# Altium PCB GbE_Interface_Adapter.PcbDoc (part 1 of 2)
Units mm, origin at the board's own origin, x right, y up, seen from the top; angles counter-clockwise.
Board outline 70.72 x 41.02 mm, 4 copper layers (Top Layer, GND, PWR/GND, Bottom Layer), stack 1.583 mm thick; 95 components, 56 nets, 318 pads, 400 vias.
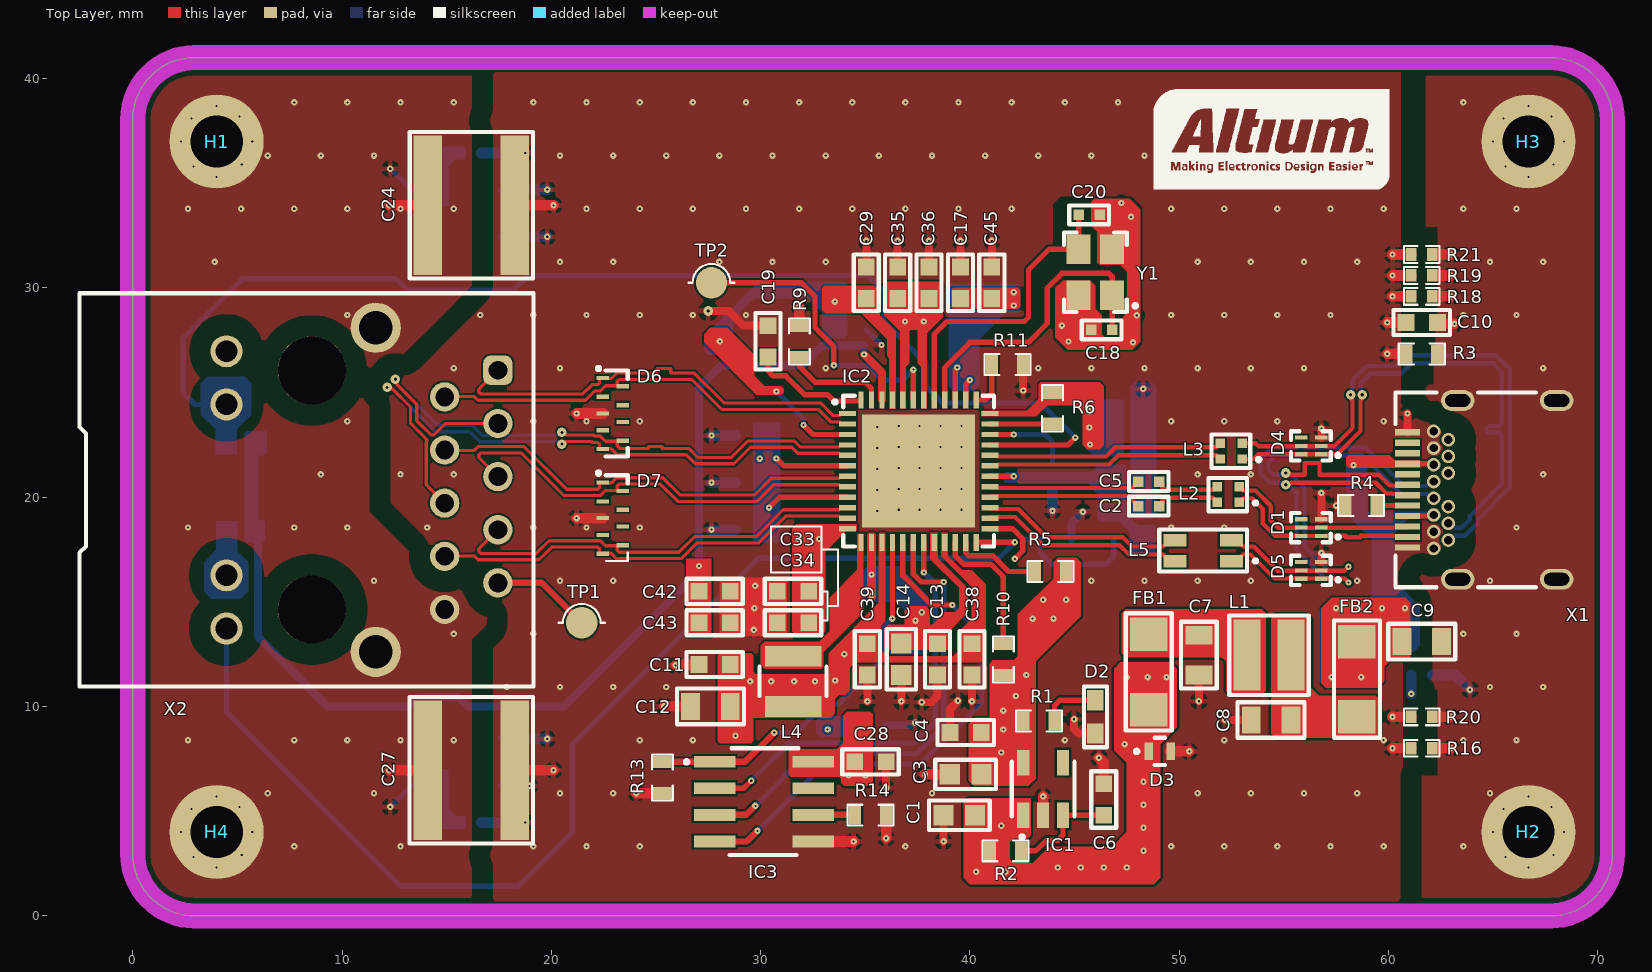
[diagram p0: Top Layer view]
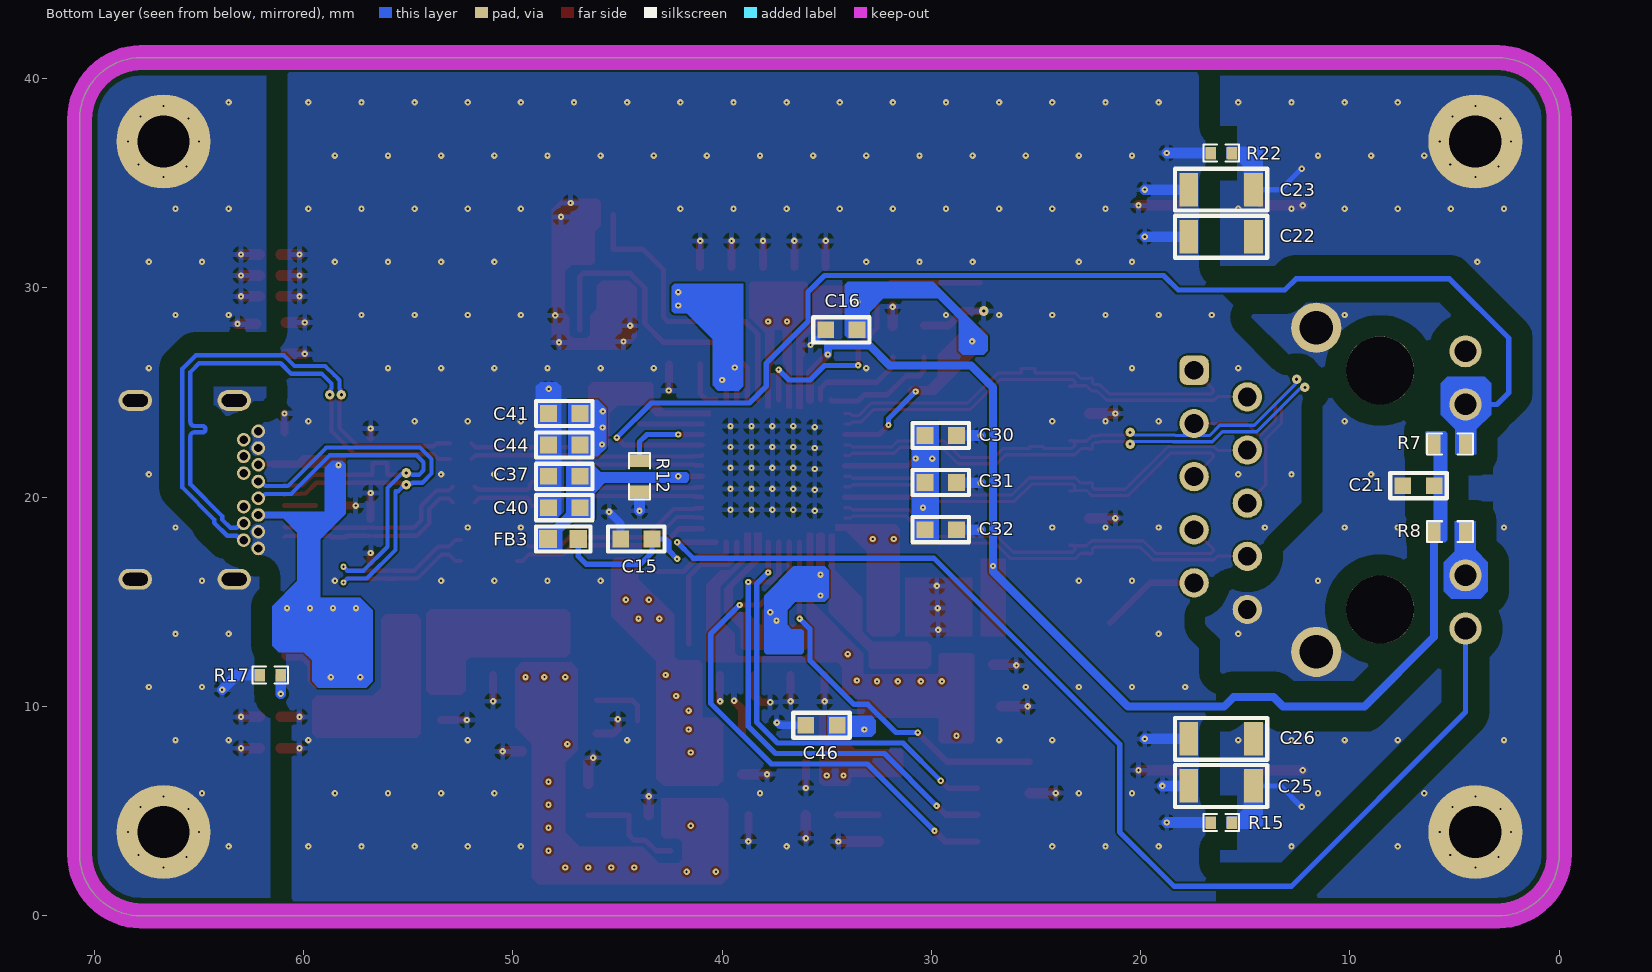
[diagram p1: Bottom Layer view, seen from below]
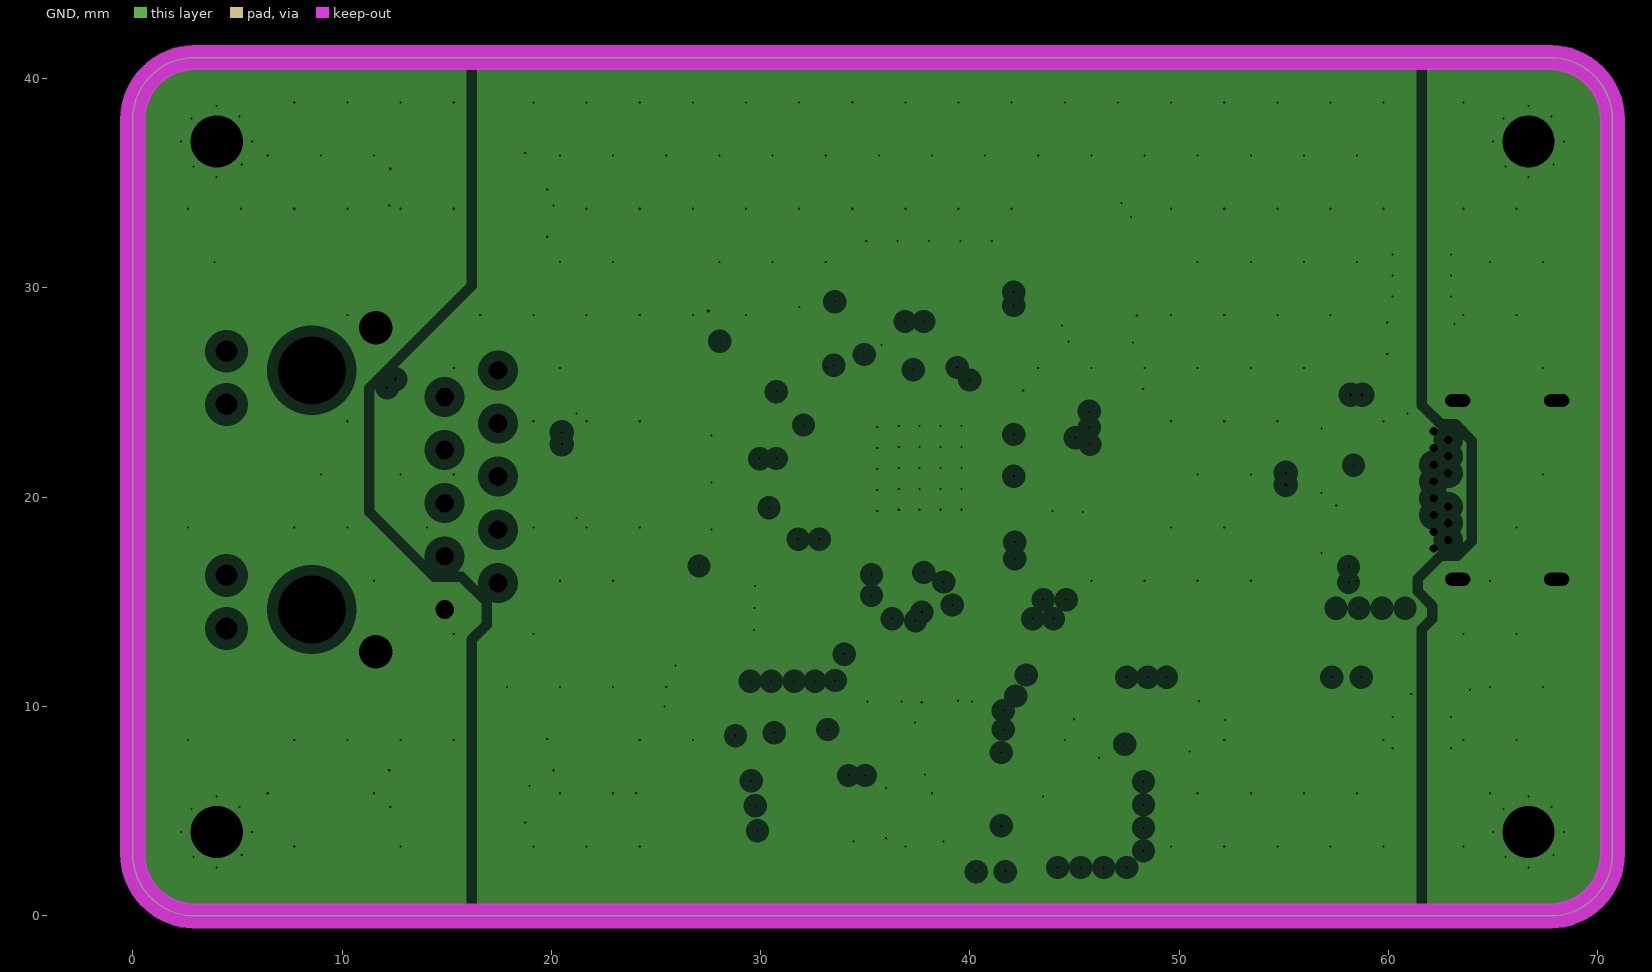
[diagram p2: GND, clearances drawn from the general rule]
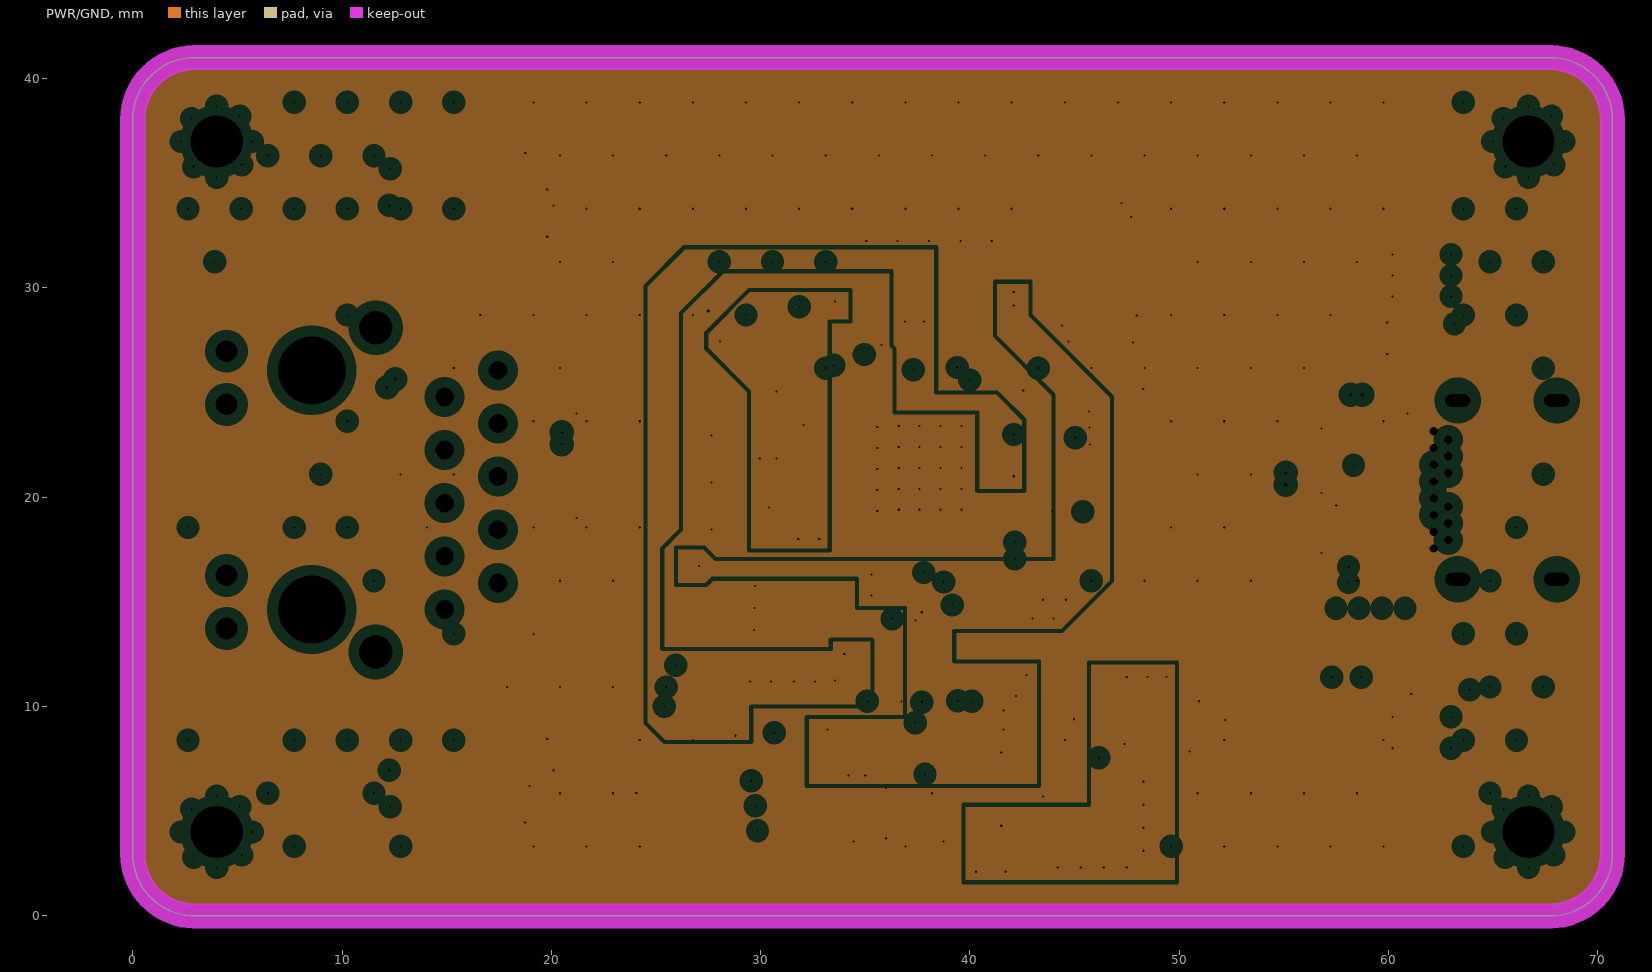
[diagram p3: PWR/GND, clearances drawn from the general rule]
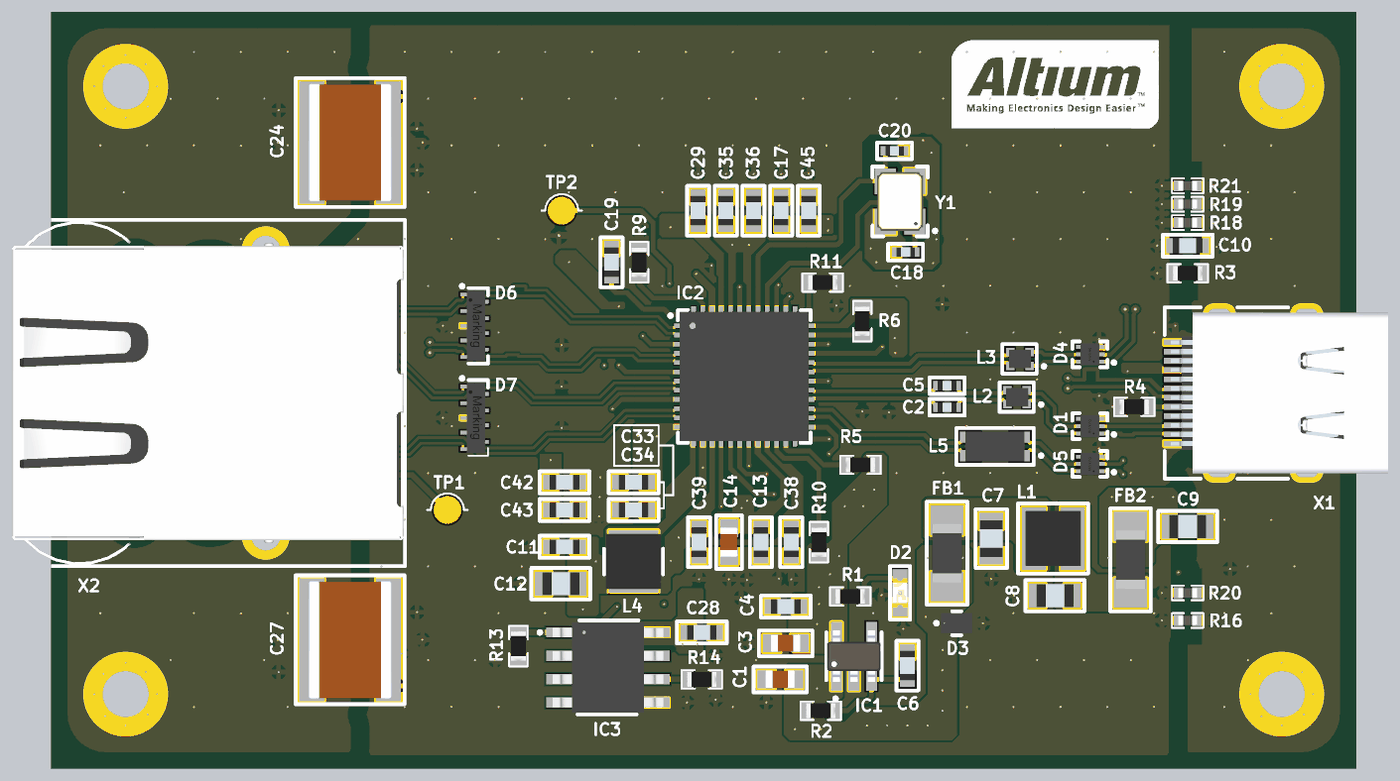
[diagram p5: 3D render of the assembled board from above, using the file's embedded part models]
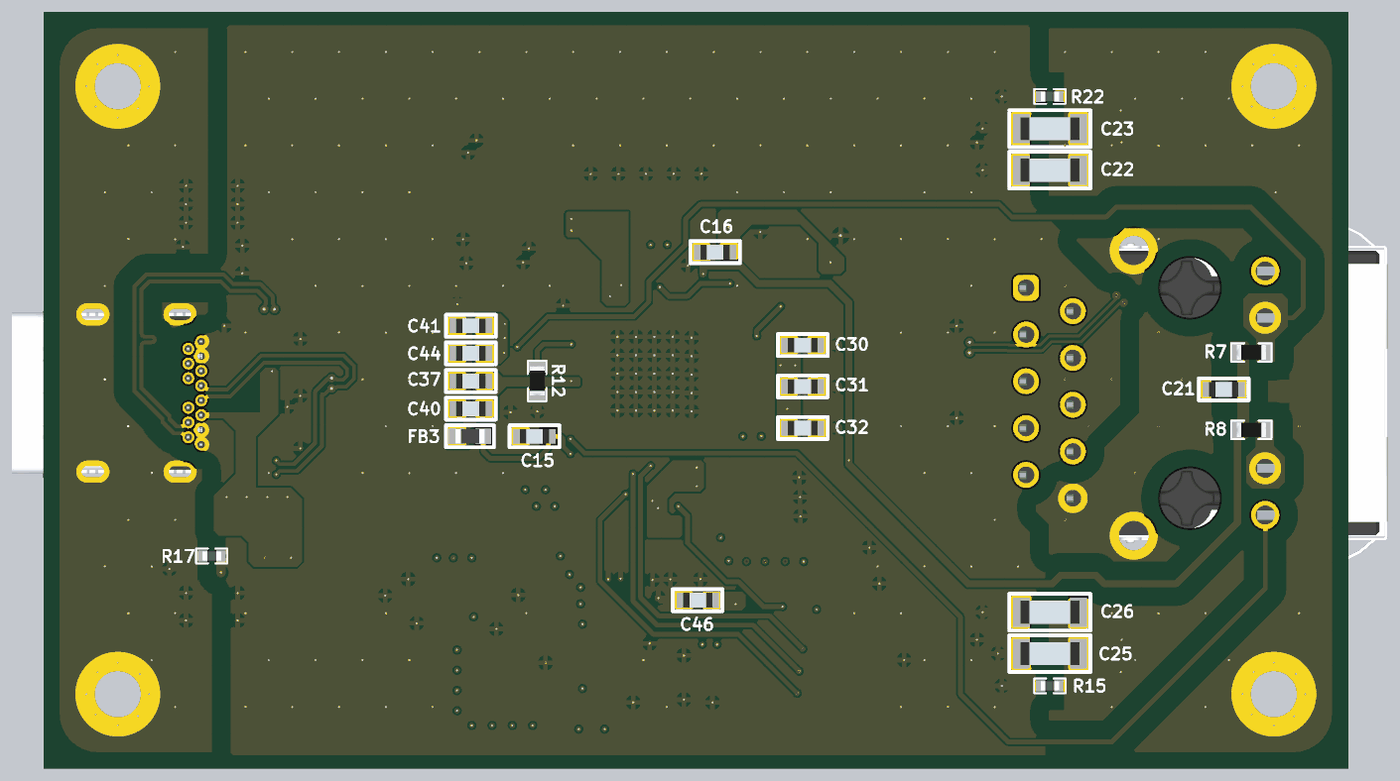
[diagram p6: 3D render of the assembled board from below, using the file's embedded part models]

## Layer stack, top to bottom
Top Solder: solder mask 0.0102, Solder Resist, Dk 3.5
Top Layer: signal copper 0.035
Dielectric 2: prepreg 0.1295, PP-017, Dk 4.3
GND: plane copper 0.0175, net (Multiple Nets)
Dielectric 1: core 1.2192, Core-024, Dk 4.6
PWR/GND: plane copper 0.0175, net (Multiple Nets)
Dielectric 3: prepreg 0.1295, PP-017, Dk 4.3
Bottom Layer: signal copper 0.035
Bottom Solder: solder mask 0.0102, Solder Resist, Dk 3.5

## Board outline
2.95,-0.011 cw(c2.95,2.95) -0.011,2.95 -0.011,38.05 cw(c2.95,38.05) 2.95,41.011 67.75,41.011 cw(c67.75,38.05) 70.711,38.05 70.711,2.95 cw(c67.75,2.95) 67.75,-0.011

## Design rules (kind name [scope] priority, off if disabled: settings)
Clearance Clearance_KeepOut_2 [InNet('SHIELD_USB') vs OnLayer('Keep-Out Layer')] p1: gap=0.254 ignorepadtopadclearanceinfootprint=TRUE
Clearance Clearance_KeepOut_1 [InNet('SHIELD') vs OnLayer('Keep-Out Layer')] p2: gap=0.254 ignorepadtopadclearanceinfootprint=TRUE
Clearance Clearance_USBShield [InNet('SHIELD_USB')] p3: gap=1.016 ignorepadtopadclearanceinfootprint=TRUE
Clearance Clearance_Shield [InNet('SHIELD')] p4: gap=1.016 ignorepadtopadclearanceinfootprint=TRUE
Clearance Clearance_Genel [All] p5: gap=0.102 ignorepadtopadclearanceinfootprint=TRUE
Clearance Clearance_Polygon [InPolygon] p6: gap=0.305 ignorepadtopadclearanceinfootprint=TRUE
Clearance Clearance_MDI [InDifferentialPairClass('ETH')] p7: gap=0.102 ignorepadtopadclearanceinfootprint=TRUE except(0.305: Arc-Arc Arc-Track Track-Track)
Clearance Clearance_Diff [InDifferentialPairClass('USB2') OR InDifferentialPairClass('USB3')] p8: gap=0.102 ignorepadtopadclearanceinfootprint=TRUE
DiffPairsRouting [InDifferentialPair ('USB2D1')] p1: maxlimit=0.178 minlimit=0.178 mostfreqgap=0.178 toplayer_minwidth=0.203 toplayer_maxwidth=0.203 toplayer_prefwidth=0.203 bottomlayer_minwidth=0.203 bottomlayer_maxwidth=0.203 bottomlayer_prefwidth=0.203 maxuncoupledlength=12.7
DiffPairsRouting USB3.0 [InDifferentialPairClass('USB3.0')] p2: maxlimit=0.178 minlimit=0.178 mostfreqgap=0.178 toplayer_minwidth=0.203 toplayer_maxwidth=0.203 toplayer_prefwidth=0.203 bottomlayer_minwidth=0.203 bottomlayer_maxwidth=0.203 bottomlayer_prefwidth=0.203 maxuncoupledlength=12.7
DiffPairsRouting USB2.0 [InDifferentialPairClass('USB2.0')] p3: maxlimit=0.178 minlimit=0.178 mostfreqgap=0.178 toplayer_minwidth=0.203 toplayer_maxwidth=0.203 toplayer_prefwidth=0.203 bottomlayer_minwidth=0.203 bottomlayer_maxwidth=0.203 bottomlayer_prefwidth=0.203 maxuncoupledlength=12.7
DiffPairsRouting ETH [InDifferentialPairClass('ETH')] p4: maxlimit=0.152 minlimit=0.152 mostfreqgap=0.152 toplayer_minwidth=0.152 toplayer_maxwidth=0.152 toplayer_prefwidth=0.152 bottomlayer_minwidth=0.152 bottomlayer_maxwidth=0.152 bottomlayer_prefwidth=0.152 maxuncoupledlength=12.7
HoleSize HoleSize_1 [All] p1: absolutevalues=TRUE maxlimit=2.54 minlimit=0.025 maxpercent=80.000 minpercent=20.000
MatchedLengths MatchedLengths_ETH [InDifferentialPairClass('ETH')] p1: tolerance=0.127 checknetsindiffpair=TRUE checkdiffpairvsdiffpair=FALSE checkxsignals=FALSE checkothers=FALSE
MatchedLengths MatchedLengths_USB3.0 [InDifferentialPairClass('USB3.0')] p2: tolerance=0.127 checknetsindiffpair=TRUE checkdiffpairvsdiffpair=FALSE checkxsignals=FALSE checkothers=FALSE
MatchedLengths MatchedLengths2.0 [InDifferentialPairClass('USB2.0')] p3: tolerance=0.127 checknetsindiffpair=TRUE checkdiffpairvsdiffpair=FALSE checkxsignals=FALSE checkothers=FALSE
PlaneClearance PlaneClearance_USBShield [InNet('SHIELD_USB')] p1: clearance=1.016
PlaneClearance PlaneClearance_Shield [InNet('SHIELD')] p2: clearance=1.016
PlaneClearance [All] p3: clearance=0.508
PlaneConnect PlaneConnect_Via [IsVia] p1: planeconnectstyle=Direct reliefexpansion=0.508 reliefentries=4 reliefconductorwidth=0.254 reliefairgap=0.254
PlaneConnect [All] p2: planeconnectstyle=Relief reliefexpansion=0.508 reliefentries=4 reliefconductorwidth=0.254 reliefairgap=0.254
PolygonConnect PolygonConnect_Via [IsVia] p1: connectstyle=Relief reliefconductorwidth=0.254 reliefentries=4 polygonreliefangle="90 Angle" airgapwidth=0.254
PolygonConnect [All] p2: connectstyle=Direct reliefconductorwidth=0.254 reliefentries=4 polygonreliefangle="90 Angle" airgapwidth=0.254
RoutingVias [All] p1: holewidth=0.152 width=0.457 viastyle="Through Hole" minholewidth=0.152 minwidth=0.457 maxholewidth=0.152 maxwidth=0.457
SolderMaskExpansion [All] p1: expansion=0.102 istentingtop=FALSE
SupplyNets "Schematic Supply Nets_7" [InNet('PHY_AVDD')] p1: voltage=0.000
SupplyNets "Schematic Supply Nets_6" [InNet('+3V3')] p2: voltage=0.000
SupplyNets "Schematic Supply Nets_5" [InNet('GND')] p3: voltage=0.000
SupplyNets "Schematic Supply Nets_4" [InNet('SHIELD_USB')] p4: voltage=0.000
SupplyNets "Schematic Supply Nets_3" [InNet('SHIELD')] p5: voltage=0.000
SupplyNets "Schematic Supply Nets_2" [InNet('VDD25')] p6: voltage=0.000
SupplyNets "Schematic Supply Nets_1" [InNet('VDD12')] p7: voltage=0.000
SupplyNets "Schematic Supply Nets" [InNet('+5V')] p8: voltage=0.000
Width Width_PWR [InNet('VBUS')] p1: maxlimit=1.27 minlimit=0.254 preferedwidth=0.762 minimp=50.000000 maximp=50.000000 favimp=50.000000
Width [All] p2: maxlimit=1.27 minlimit=0.152 preferedwidth=0.152 minimp=50.000000 maximp=50.000000 favimp=50.000000
26 further rules are at their usual default settings.

## Classes and differential pairs
differential pair class ETH: TR0 TR1 TR2 TR3
differential pair class USB2.0: USB2D USB2D1
differential pair class USB3.0: USB3RX USB3RX1 USB3TX USB3TX1 USB3TX2
differential pair USB3TX2: +USB3TX2_P -USB3TX2_N
differential pair USB3TX: +USB3TX_P -USB3TX_N
differential pair USB3TX1: +USB3TX1_P -USB3TX1_N
differential pair USB3RX: +USB3RX_P -USB3RX_N
differential pair USB3RX1: +USB3RX1_P -USB3RX1_N
differential pair USB2D: +USB2D_P -USB2D_N
differential pair USB2D1: +USB2D1_P -USB2D1_N
differential pair TR3: +TR3_P -TR3_N
differential pair TR2: +TR2_P -TR2_N
differential pair TR1: +TR1_P -TR1_N
differential pair TR0: +TR0_P -TR0_N

## Components (designator, comment, footprint, x,y, rotation, side; value= is the part's Value field where it differs from the comment)
C1 "GRM188R61A106ME69D" "CAP CER 0603 MURATA" 39.5,4.8 r0 top
C2 "885012105018" "CAP CER 0402 (1005 Metric)" 48.55,19.575 r180 top
C3 "GRM188R61A106ME69D" "CAP CER 0603 MURATA" 39.795,6.755 r0 top
C4 "885012206071" "CAP CER 0603 (1608 Metric)" 39.8,8.755 r0 top
C5 "885012105018" "CAP CER 0402 (1005 Metric)" 48.55,20.75 r180 top
C6 "885012206071" "CAP CER 0603 (1608 Metric)" 46.4,5.55 r270 top
C7 "885012107018" "CAP CER 0805 (2012 Metric)" 50.95,12.45 r90 top
C8 "885012107018" "CAP CER 0805 (2012 Metric)" 54.4,9.35 r0 top
C9 "885012207098" "CAP CER 0805 (2012 Metric)" 61.6,13.1 r180 top
C10 "885012206071" "CAP CER 0603 (1608 Metric)" 61.6,28.35 r180 top
C11 "885012206071" "CAP CER 0603 (1608 Metric)" 27.8,12 r0 top
C12 "885012107005" "CAP CER 0805 (2012 Metric)" 27.6,10 r0 top
C13 "885012206071" "CAP CER 0603 (1608 Metric)" 38.45,12.25 r90 top
C14 "GRM188R61A106ME69D" "CAP CER 0603 MURATA" 36.725,12.255 r90 top
C15 "885012206052" "CAP CER 0603 (1608 Metric)" 44.1,18 r180 bottom
C16 "885012206052" "CAP CER 0603 (1608 Metric)" 34.3,28 r180 bottom
C17 "885012206052" "CAP CER 0603 (1608 Metric)" 39.55,30.25 r270 top
C18 "885012005056" "CAP CER 0402 (1005 Metric)" 46.3,28 r180 top
C19 "885012206052" "CAP CER 0603 (1608 Metric)" 30.35,27.45 r270 top
C20 "885012005056" "CAP CER 0402 (1005 Metric)" 45.7,33.5 r0 top
C21 "885012206065" "CAP CER 0603 (1608 Metric)" 6.72,20.55 r180 bottom
C22 "885342208023" "CAP CER 1206 (3216 Metric)" 16.15,32.45 r180 bottom
C23 "885342208023" "CAP CER 1206 (3216 Metric)" 16.15,34.7 r180 bottom
C24 "HV1825Y152KXMATHV" "CAP CER 1825 (4564 Metric)" 16.176,33.95 r180 top
C25 "885342208023" "CAP CER 1206 (3216 Metric)" 16.15,6.2 r180 bottom
C26 "885342208023" "CAP CER 1206 (3216 Metric)" 16.15,8.45 r180 bottom
C27 "HV1825Y152KXMATHV" "CAP CER 1825 (4564 Metric)" 16.174,6.95 r180 top
C28 "885012206071" "CAP CER 0603 (1608 Metric)" 35.25,7.35 r180 top
C29 "885012206071" "CAP CER 0603 (1608 Metric)" 35.05,30.25 r270 top
C30 "885012206071" "CAP CER 0603 (1608 Metric)" 29.55,22.95 r0 bottom
C31 "885012206071" "CAP CER 0603 (1608 Metric)" 29.55,20.7 r0 bottom
C32 "885012206071" "CAP CER 0603 (1608 Metric)" 29.55,18.45 r0 bottom
C33 "885012206071" "CAP CER 0603 (1608 Metric)" 31.55,15.5 r0 top
C34 "885012206071" "CAP CER 0603 (1608 Metric)" 31.55,14 r0 top
C35 "885012206071" "CAP CER 0603 (1608 Metric)" 36.55,30.25 r270 top
C36 "885012206071" "CAP CER 0603 (1608 Metric)" 38.05,30.25 r270 top
C37 "885012206071" "CAP CER 0603 (1608 Metric)" 47.55,21 r180 bottom
C38 "885012206071" "CAP CER 0603 (1608 Metric)" 40.1,12.25 r90 top
C39 "885012206071" "CAP CER 0603 (1608 Metric)" 35.1,12.25 r90 top
C40 "885012206071" "CAP CER 0603 (1608 Metric)" 47.55,19.5 r180 bottom
C41 "885012206071" "CAP CER 0603 (1608 Metric)" 47.55,24 r180 bottom
C42 "885012206071" "CAP CER 0603 (1608 Metric)" 27.8,15.5 r180 top
C43 "885012206071" "CAP CER 0603 (1608 Metric)" 27.8,14 r180 top
C44 "885012206071" "CAP CER 0603 (1608 Metric)" 47.55,22.5 r180 bottom
C45 "885012206071" "CAP CER 0603 (1608 Metric)" 41.05,30.25 r270 top
C46 "885012206071" "CAP CER 0603 (1608 Metric)" 35.25,9.1 r180 bottom
D1 "824012823" 6-XFDFN 56.3,18.55 r90 top
D2 "150060VS75020" "LED GREEN 0603" 46,9.5 r90 top
D3 "ESDA7P60-1U1M" 2-UDFN 49.071,7.85 r0 top
D4 "824012823" 6-XFDFN 56.3,22.45 r90 top
D5 "824012823" 6-XFDFN 56.3,16.5 r90 top
D6 "824014885" DFN3810-9 23,24 r270 top
D7 "824014885" DFN3810-9 23,19 r270 top
FB1 "74279221111" "FB 1206 (3216 Metric)" 48.55,11.65 r90 top
FB2 "74279221111" "FB 1206 (3216 Metric)" 58.5,11.3 r90 top
FB3 "742792625" "FB 0603 (1608 Metric)" 47.6,18 r0 bottom
H1 "Hole" "MOUNTING HOLE" 4,37 r0 top
H2 "Hole" "MOUNTING HOLE" 66.7,4 r0 top
H3 "Hole" "MOUNTING HOLE" 66.7,37 r0 top
H4 "Hole" "MOUNTING HOLE" 4,4 r0 top
IC1 "TLV75733PDBVR" SOT-23-5 43.5,6.055 r90 top
IC2 "LAN7800/Y9X" "48-SQFN (7x7)" 37.55,21.25 r0 top
IC3 "93AA66C-I/SN" SOIC-8 30.162,5.45 r0 top
L1 "74438336012" "IND 1212 (3030 Metric)" 54.3,12.45 r0 top
L2 "7442335600" "CMC (1.20mm x 1.00mm), 4 PC Pad" 52.35,20.125 r180 top
L3 "7442335600" "CMC (1.20mm x 1.00mm), 4 PC Pad" 52.5,22.2 r180 top
L4 "74404032033" "IND Nonstandard" 31.55,11.2 r270 top
L5 "744232090" "CMC (3.20mm x 1.60mm),4 PC Pad" 51.15,17.45 r180 top
R1 "RC0603FR-07330RL" "RES 0603 SMD" 43.3,9.305 r180 top
R2 "RC0603FR-0710KL" "RES 0603 SMD" 41.7,3.1 r180 top
R3 "RC0603FR-07330RL" "RES 0603 SMD" 61.6,26.85 r180 top
R4 "RC0603FR-075K1L" "RES 0603 SMD" 58.7,19.6 r0 top
R5 "RC0603FR-0710KL" "RES 0603 SMD" 43.85,16.45 r0 top
R6 "RC0603FR-0710KL" "RES 0603 SMD" 43.95,24.25 r90 top
R7 "RC0603FR-071KL" "RES 0603 SMD" 5.22,22.55 r180 bottom
R8 "RC0603FR-071KL" "RES 0603 SMD" 5.22,18.35 r180 bottom
R9 "RC0603FR-072KL" "RES 0603 SMD" 31.85,27.45 r90 top
R10 "RC0603FR-0710KL" "RES 0603 SMD" 41.6,12.25 r90 top
R11 "RC0603FR-0712KL" "RES 0603 SMD" 41.8,26.35 r180 top
R12 "RC0603FR-0710KL" "RES 0603 SMD" 43.95,21 r90 bottom
R13 "RC0603FR-0710KL" "RES 0603 SMD" 25.3,6.605 r90 top
R14 "RC0603FR-0710KL" "RES 0603 SMD" 35.25,4.8 r180 top
R15 "RC0402FR-070RL" "RES 0402 SMD" 16.15,4.45 r180 bottom
R16 "RC0402FR-070RL" "RES 0402 SMD" 61.6,8 r180 top
R17 "RC0402FR-070RL" "RES 0402 SMD" 61.6,11.5 r180 bottom
R18 "RC0402FR-070RL" "RES 0402 SMD" 61.6,29.6 r180 top
R19 "RC0402FR-070RL" "RES 0402 SMD" 61.6,30.6 r180 top
R20 "RC0402FR-070RL" "RES 0402 SMD" 61.6,9.5 r0 top
R21 "RC0402FR-070RL" "RES 0402 SMD" 61.6,31.6 r0 top
R22 "RC0402FR-070RL" "RES 0402 SMD" 16.15,36.45 r180 bottom
TP1 "Test Point" "TEST POINT" 21.45,14 r0 top
TP2 "Test Point" "TEST POINT" 27.65,30.25 r0 top
X1 "632723300011" 632723300011 66.85,20.35 r90 top
X2 "7499111121A" 7499111121A 8.55,20.35 r270 top
Y1 "TSX-3225 25.0000MF10P-C3" "TSX-3225 25.0000MF10P-C3" 46,30.75 r180 top

## Footprints (in the part's own frame and the unit in brackets; to place one, negate y for a bottom-side part, rotate by r counter-clockwise, add the part's x,y. Pads: shape width x height; smd on the part's side, far side on the other; paste and mask are expansions set on the pad)
2-UDFN [mil]
  rect 16x33 smd paste+0 mask+4.02: 1(-20.5,0) 2(20.5,0)
  silkscreen extent -45,-26 10,26, body extent -34,-21 34,21, height 24
6-XFDFN [mm]
  rect 0.2x0.6 smd: 1(-0.4,-0.5) 2(0,-0.5) 3(0.4,-0.5) 4(0.4,0.45) 5(0,0.45) 6(-0.4,0.45)
  silkscreen extent -0.7,-1.35 0.7,0.95, body extent -0.6,-0.5 0.6,0.5, height 0.45
"48-SQFN (7x7)" [mil]
  rect 32x10 smd paste+0 mask+1.97: 1(-134,108.27) 2(-134,88.58) 3(-134,68.9) 4(-134,49.21) 5(-134,29.53) 6(-134,9.84) 7(-134,-9.84) 8(-134,-29.53) 9(-134,-49.21) 10(-134,-68.9) 11(-134,-88.58) 12(-134,-108.27) 25(134,-108.27) 26(134,-88.58) 27(134,-68.9) 28(134,-49.21) 29(134,-29.53) 30(134,-9.84) 31(134,9.84) 32(134,29.53) 33(134,49.21) 34(134,68.9) 35(134,88.58) 36(134,108.27)
  rect 10x32 smd paste+0 mask+1.97: 13(-108.27,-134) 14(-88.58,-134) 15(-68.9,-134) 16(-49.21,-134) 17(-29.53,-134) 18(-9.84,-134) 19(9.84,-134) 20(29.53,-134) 21(49.21,-134) 22(68.9,-134) 23(88.58,-134) 24(108.27,-134) 37(108.27,134) 38(88.58,134) 39(68.9,134) 40(49.21,134) 41(29.53,134) 42(9.84,134) 43(-9.84,134) 44(-29.53,134) 45(-49.21,134) 46(-68.9,134) 47(-88.58,134) 48(-108.27,134)
  rect 213x213 smd paste-106.5 mask+1.97: 49(0,0)
  silkscreen extent -159,-142 142,142, body extent -138,-138 138,138, height 39
7499111121A [mm]
  round 3.25 hole 3.25 unplated: MH1(-5.715,0) MH2(5.715,0)
  rrect50% 1.4x1.4 hole 0.9: P1(-5.715,8.89)
  round 1.4 hole 0.9: P2(-4.445,6.35) P3(-3.175,8.89) P4(-1.905,6.35) P5(-0.635,8.89) P6(0.635,6.35) P7(1.905,8.89) P8(3.175,6.35) P9(4.445,8.89) P10(5.715,6.35)
  round 1.53 hole 1.03: P11(-6.625,-4.08) P12(-4.085,-4.08) P13(4.085,-4.08) P14(6.625,-4.08)
  round 2.4 hole 1.6: S1(-7.745,3.05) S2(7.745,3.05)
  silkscreen extent -9.4,-11.1 9.4,10.6, body extent -9.35,-10.72 9.35,10.54, height 15.05
632723300011 [mm]
  rect 0.3x1.2 smd: A1(-2.75,5.93) A2(-2.25,5.93) A3(-1.75,5.93) A4(-1.25,5.93) A5(-0.75,5.93) A6(-0.25,5.93) A7(0.25,5.93) A8(0.75,5.93) A9(1.25,5.93) A10(1.75,5.93) A11(2.25,5.93) A12(2.75,5.93)
  round 0.65 hole 0.4: B1(2,4.68) B1(2.8,4.68) B2(2.4,3.98) B3(1.6,3.98) B4(1.2,4.68) B5(0.8,3.98) B6(0.4,4.68) B7(-0.4,4.68) B8(-0.8,3.98) B9(-1.2,4.68) B10(-1.6,3.98) B11(-2.4,3.98) B12(-2.8,4.68) B12(-2,4.68)
  oval 1x1.6 hole 0.6 slot 1.2 at 90 deg: SH1(-4.27,-1.2) SH2(-4.27,3.53) SH3(4.27,-1.2) SH4(4.27,3.53)
  silkscreen extent -4.65,-0.2 4.65,6.5, body extent -4.37,-5.63 4.37,6.17, height 3.06
"CAP CER 0402 (1005 Metric)" [mm]
  rect 0.5x0.5 smd: 1(-0.5,0) 2(0.5,0)
  silkscreen extent -0.95,-0.45 0.95,0.45, body extent -0.5,-0.25 0.5,0.25, height 0.5
"CAP CER 0603 (1608 Metric)" [mm]
  rect 0.8x0.8 smd: 1(-0.75,0) 2(0.75,0)
  silkscreen extent -1.35,-0.6 1.35,0.6, body extent -0.8,-0.4 0.8,0.4, height 0.8
"CAP CER 0603 MURATA" [mm]
  rect 0.96x0.97 smd: 1(-0.755,0) 2(0.755,0)
  silkscreen extent -1.45,-0.7 1.45,0.7, body extent -0.8,-0.47 0.8,0.49, height 0.77
"CAP CER 0805 (2012 Metric)" [mm]
  rect 0.9x1.3 smd: 1(-0.95,0) 2(0.95,0)
  silkscreen extent -1.6,-0.85 1.6,0.85, body extent -1,-0.63 1,0.63, height 0.8
"CAP CER 1206 (3216 Metric)" [mm]
  rect 0.9x1.6 smd: 1(-1.55,0) 2(1.55,0)
  silkscreen extent -2.2,-1 2.2,1, body extent -1.6,-0.63 1.6,0.63, height 1.6
"CAP CER 1825 (4564 Metric)" [mm]
  rect 1.36x6.66 smd: 1(-2.076,0) 2(2.076,0)
  silkscreen extent -2.95,-3.5 2.95,3.5, body extent -2.25,-3.2 2.25,3.2, height 2.7
"CMC (1.20mm x 1.00mm), 4 PC Pad" [mm]
  rect 0.45x0.45 smd: 1(-0.525,0.375) 2(0.525,0.375) 3(0.525,-0.375) 4(-0.525,-0.375)
  silkscreen extent -1.35,-0.8 0.95,0.8, body extent -0.6,-0.5 0.6,0.5, height 0.9
"CMC (3.20mm x 1.60mm),4 PC Pad" [mm]
  rect 1.1x0.6 smd: 1(-1.35,0.5) 2(1.35,0.5) 3(1.35,-0.5) 4(-1.35,-0.5)
  silkscreen extent -2.55,-1 2.1,1, body extent -1.6,-0.8 1.6,0.8, height 1.8
DFN3810-9 [mm]
  rect 0.2x0.6 smd: 1(-1.7,-0.55) 2(-0.8,-0.55) 3(0,-0.55) 4(0.8,-0.55) 5(1.7,-0.55) 6(1.3,0.4) 7(0.4,0.4) 8(-0.4,0.4) 9(-1.3,0.4)
  silkscreen extent -2.2,-0.8 2.05,0.65, body extent -1.9,-0.5 1.9,0.5, height 0.5
"FB 0603 (1608 Metric)" [mm]
  rect 0.85x0.85 smd: 1(-0.725,0) 2(0.725,0)
  silkscreen extent -1.3,-0.6 1.3,0.6, body extent -0.8,-0.4 0.8,0.4, height 0.8
"FB 1206 (3216 Metric)" [mm]
  rect 1.6x1.8 smd: 1(-1.8,0) 2(1.8,0)
  silkscreen extent -2.8,-1.1 2.8,1.1, body extent -1.6,-0.8 1.6,0.8, height 1.07
"IND 1212 (3030 Metric)" [mm]
  rect 1.3x3.4 smd paste+0 mask+0.1: 1(-1.05,0) 2(1.05,0)
  silkscreen extent -1.9,-1.9 1.9,1.9, body extent -1.5,-1.5 1.5,1.5, height 2
"IND Nonstandard" [mm]
  rect 1x2.7 smd: 1(-1.2,0) 2(1.2,0)
  silkscreen extent -0.7,-1.6 0.7,1.6, body extent -1.5,-1.5 1.5,1.5, height 1.5
"LED GREEN 0603" [mm]
  rect 0.965x0.8 smd: 1(-0.8,0) 2(0.8,0)
  silkscreen extent -1.45,-0.55 1.45,0.55, body extent -0.8,-0.4 0.8,0.4, height 0.25
"MOUNTING HOLE" [mm]
  round 4.5 hole 2.5 mask+0.05: H(0,0)
"RES 0402 SMD" [mm]
  rect 0.5x0.6 smd: 1(-0.5,0) 2(0.5,0)
  silkscreen extent -0.85,-0.4 0.85,0.4, body extent -0.5,-0.25 0.5,0.25, height 0.4
"RES 0603 SMD" [mm]
  rect 0.6x0.9 smd mask+0.05: 1(-0.75,0) 2(0.75,0)
  silkscreen extent -1.1,-0.5 1.1,0.5, body extent -0.8,-0.4 0.8,0.4, height 0.45
SOIC-8 [mil]
  rect 78x22 smd paste+0 mask+1.97: 1(-93,75) 2(-93,25) 3(-93,-25) 4(-93,-75) 5(93,-75) 6(93,-25) 7(93,25) 8(93,75)
  silkscreen extent -148,-100 65,100, body extent -118,-96 118,96, height 69
SOT-23-5 [mm]
  rect 1.21x0.59 smd: 1(-1.255,0.95) 2(-1.255,0) 3(-1.255,-0.95) 4(1.255,-0.95) 5(1.255,0.95)
  silkscreen extent -2.35,-1.5 1.3,1.5, body extent -1.4,-1.45 1.4,1.45, height 1.45
"TEST POINT" [mm]
  round 1.5 smd paste-1.5: TP(0,0)
  silkscreen extent -1.1,0 1.1,0.9
"TSX-3225 25.0000MF10P-C3" [mm]
  rect 1.15x1.4 smd: 1(-0.8,1.1) 2(-0.8,-1.1) 3(0.8,-1.1) 4(0.8,1.1)
  silkscreen extent -1.95,-1.9 1.5,1.9, body extent -1.25,-1.6 1.25,1.6, height 0.6

## Part data
C1 C3 C14: library part "CAP CER 10UF 10V", "10 µF ±20% 10V Ceramic Capacitor X5R 0603 (1608 Metric)", Capacitance=10uF, Manufacturer="Murata Electronics", Operating Temperature="-55°C ~ 85°C", Package/Case="0603 (1608 Metric)", Temperature Coefficient=X5R, Tolerance=±20%, Voltage-Rated=10V, Designed by=ADAK, Manufacturer Product Number=GRM188R61A106ME69D
C2 C5: library part "CAP CER 0.1UF 25V 0402", "0.1 µF ±20% 25V Ceramic Capacitor X5R 0402 (1005 Metric)", Capacitance=0.1uF, Manufacturer="Würth Elektronik", Operating Temperature="-55°C ~ 85°C", Package/Case="0402 (1005 Metric)", Temperature Coefficient=X5R, Tolerance=±20%, Voltage - Rated=25V, Designed by=ADAK, Manufacturer Product Number=885012105018
C4 C6 C10 C11 C13 C29 C30 C31 C32 C33 C34 C35 C36 C37 C38 C39 C40 C41 C42 C43 C44 C45 C46: library part "CAP CER 0.1UF 25V", "0.1 µF ±10% 25V Ceramic Capacitor X7R 0603 (1608 Metric)", Capacitance=100nF, Manufacturer="Würth Elektronik", Operating Temperature="-55°C ~ 125°C", Package/Case="0603 (1608 Metric)", Temperature Coefficient=X7R, Tolerance=±10%, Voltage-Rated=25V, Designed by=ADAK, Manufacturer Product Number=885012206071
C7 C8: library part "CAP CER 4.7UF 25V", "4.7 µF ±20% 25V Ceramic Capacitor X5R 0805 (2012 Metric)", Capacitance="4.7 uF", Manufacturer="Würth Elektronik", Operating Temperature="-55°C ~ 85°C", Package/Case="0805 (2012 Metric)", Temperature Coefficient=X5R, Tolerance=±20%, Voltage Rated=25V, Designed by=ADAK, Manufacturer Product Number=885012107018
C9: library part "CAP CER 0.1UF 50V", "0.1 µF ±10% 50V Ceramic Capacitor X7R 0805 (2012 Metric)", Capacitance="0.1 uF", Manufacturer="Würth Elektronik", Operating Temperature="-55°C ~ 125°C", Package/Case="0805 (2012 Metric)", Temperature Coefficient=X7R, Tolerance=±10%, Voltage - Rated=50V, Designed by=ADAK, Manufacturer Product Number=885012207098
C12: library part "CAP CER 22UF 6.3V", "22 µF ±20% 6.3V Ceramic Capacitor X5R 0805 (2012 Metric)", Capacitance=22uF, Manufacturer="Würth Elektronik", Operating Temperature="-55°C ~ 85°C", Package/Case="0805 (2012 Metric)", Temperature Coefficient=X5R, Tolerance=±20%, Voltage-Rated=6.3V, Designed by=ADAK, Manufacturer Product Number=885012107005
C15 C16 C17 C19: library part "CAP CER 1UF 16V 0603", "1 µF ±10% 16V Ceramic Capacitor X7R 0603 (1608 Metric)", Capacitance=1uF, Manufacturer="Würth Elektronik", Operating Temperature="-55°C ~ 125°C", Package/Case="0603 (1608 Metric)", Temperature Coefficient=X7R, Tolerance=±10%, Voltage-Rated=16V, Designed by=ADAK, Manufacturer Product Number=885012206052
C18 C20: library part "CAP CER 15PF 50V", "15 pF ±5% 50V Ceramic Capacitor C0G, NP0 0402 (1005 Metric)", Capacitance=15pF, Manufacturer="Würth Elektronik", Operating Temperature="-55°C ~ 125°C", Package/Case="0402 (1005 Metric)", Temperature Coefficient="C0G, NP0", Tolerance=±5%, Voltage-Rated=50V, Designed by=ADAK, Manufacturer Product Number=885012005056
C21: library part "CAP CER 10000PF 25V", "10000 pF ±10% 25V Ceramic Capacitor X7R 0603 (1608 Metric)", Capacitance=10nF, Manufacturer="Würth Elektronik", Operating Temperature="-55°C ~ 125°C", Package/Case="0603 (1608 Metric)", Temperature Coefficient=X7R, Tolerance=±10%, Voltage-Rated=25V, Designed by=ADAK, Manufacturer Product Number=885012206065
C22 C23 C25 C26: library part "CAP CER 470PF 2000V", "470 pF ±10% 2000V (2kV) Ceramic Capacitor X7R 1206 (3216 Metric)", Capacitance=470pF, Manufacturer="Würth Elektronik", Operating Temperature="-55°C ~ 125°C", Package/Case="1206 (3216 Metric)", Temperature Coefficient=X7R, Tolerance=±10%, Voltage-Rated="2000V (2kV)", Designed by=ADAK, Feature="High Voltage", Manufacturer Product Number=885342208023
C24 C27: library part "CAP CER 1500PF 5KV", "CAP CER 1500PF 5KV X7R 1825", Capacitance="1500 pF", Manufacturer="Vishay Vitramon", Operating Temperature="-55°C ~ 125°C", Package/Case="1825 (4564 Metric)", Temperature Coefficient=X7R, Tolerance=±10%, Voltage-Rated="5000V (5kV)", Designed by=ADAK, Feature="High Voltage", Manufacturer Product Number=HV1825Y152KXMATHV
C28: library part "CAP CER 0.1UF 25V", "0.1 µF ±10% 25V Ceramic Capacitor X7R 0603 (1608 Metric)", Capacitance=0.1uF, Manufacturer="Würth Elektronik", Operating Temperature="-55°C ~ 125°C", Package/Case="0603 (1608 Metric)", Temperature Coefficient=X7R, Tolerance=±10%, Voltage-Rated=25V, Designed by=ADAK, Manufacturer Product Number=885012206071
D1 D4 D5: library part "TVS DIODE 3.3VWM", "TVS DIODE 3.3VWM 13VC DFN1210-6", Current - Peak Pulse (10/1000µs)=3A, Manufacturer="Würth Elektronik", Operating Temperature="-55°C ~ 85°C (TA)", Package/Case=6-XFDFN, Voltage - Breakdown (Min)=4.5V, Voltage - Clamping (Max) @ Ipp=13V(Typ), Voltage - Reverse Standoff (Typ)=3.3V(Max), Designed by=ADAK, Manufacturer Product Number=824012823, Unidirectional Channels=2
D2: library part "LED GREEN 0603", "LED GREEN CLEAR 0603 SMD", Color=Green, Current - Test=20mA, Manufacturer="Würth Elektronik", Package Case="0603 (1608 Metric)", Voltage - Forward (Vf) (Typ)=2V, Designed by=ADAK, Manufacturer Product Number=150060VS75020, Mounting Type="Surface Mount"
D3: library part "TVS DIODE 5VWM 11.6VC", "TVS DIODE 5VWM 11.6VC 1610", Current - Peak Pulse (10/1000µs)="60A (8/20µs)", Manufacturer=STMicroelectronics, Operating Temperature="-55°C ~ 150°C (TJ)", Package/Case=2-UDFN, Power - Peak Pulse=700W, Voltage - Breakdown (Min)=6.4V, Voltage - Clamping (Max) @ Ipp=11.6V, Voltage - Reverse Standoff (Typ)=5V, Designed by=ADAK, Manufacturer Product Number=ESDA7P60-1U1M, Type=Zener
D6 D7: library part "TVS DIODE 5VWM 10.5VC", "TVS DIODE 5VWM 10.5VC DFN3810-9", Current - Peak Pulse (10/1000µs)=5A, Manufacturer="Würth Elektronik", Operating Temperature="-55°C ~ 85°C (TA)", Package/Case=9-UDFN, Voltage - Breakdown (Min)=6V, Voltage - Clamping (Max) @ Ipp="10.5V (Typ)", Voltage - Reverse Standoff (Typ)="5V (Max)", Designed by=ADAK, Manufacturer Product Number=824014885, Unidirectional Channels=8
FB1 FB2: library part "FERRITE BEAD 110 OHM", "FERRITE BEAD 110 OHM 1206 1LN", Current Rating (Max)=5.4A, DC Resistance=15mOhm, Manufacturer="Würth Elektronik", Operating Temperature="-55°C ~ 125°C", Package/Case="1206 (3216 Metric)", Impedance @ Frequency="110R @ 100 MHz", Designed by=ADAK, Manufacturer Product Number=74279221111
FB3: library part "FERRITE BEAD 120 OHM", "FERRITE BEAD 120 OHM 0603 1LN", Current Rating (Max)=2A, DC Resistance (DCR) (Max)=50mOhm, Manufacturer="Würth Elektronik", Operating Temperature="-55°C ~ 125°C", Package/Case="0603 (1608 Metric)", Impedance @ Frequency="120R @ 100 MHz", Designed by=ADAK, Filter type="Signal Line", Manufacturer Product Number=742792625
H1 H2 H3 H4: library part "Mounting Hole", "Mounting Hole"
IC1: "IC REG LINEAR 3.3V 1A SOT23-5", Manufacturer="Texas Instruments", Operating Temperature="-40°C ~ 125°C (TJ)", Package/Case="SC-74A, SOT-753", Voltage - Output (Min/Fixed)=3.3V, Voltage - Input (Max)=5.5V, Voltage Dropout (Max)="0.475V @ 1A", Designed by=ADAK, Manufacturer Product Number=TLV75733PDBVR
IC2: "IC ETHERNET CTLR USB 48SQFN", Current-Supply="1 ~ 4mA", Manufacturer="Microchip Technology", Operatin Temperature="0°C ~ 70°C", Package/Case="48-VFQFN Exposed Pad", Voltage-Supply="1.2V, 2.5V, 3.3V", Designed by=ADAK, Manufacturer Product Number=LAN7800/Y9X, Protocol=Ethernet, Standarts="10/100/1000 Base-TX PHY"
IC3: library part "IC EEPROM 4KBIT", "IC EEPROM 4KBIT MICROWIRE 8SOIC", Clock Frequency=3MHz, Manufacturer="Microchip Technology", Operating Temperature="-40°C ~ 85°C (TA)", Supplier Device Package=8-SOIC, Voltage-Supply="1.8V ~ 5.5V", Designed by=ADAK, Manufacturer Product Number=93AA66C-I/SN, Memory Size=4Kbit
L1: library part "IND 1.2UH", "FIXED IND 1.2UH 3.9A 36 MOHM SMD", Current - Saturation (Isat)=4.75A, Current Rating (Amps)=3.9A, DC Resistance (DCR)="36mOhm (Max)", Manufacturer="Würth Elektronik", Operating Temperature="-40°C ~ 125°C", Package/Case="1212 (3030 Metric)", Tolerance=±20%, Inductance="1.2 µH", Designed by=ADAK, Manufacturer Product Number=74438336012
L2 L3: library part "CMC 60OHM", "CMC 600MA 2LN 60OHM SMD AEC-Q200", Current Rating (Max)=600mA, DC Resistance (DCR) (Max)=200mOhm, Manufacturer="Würth Elektronik", Operating Temperature="-40°C ~ 105°C", Package/Case="Horizontal, 4 PC Pad", Voltage Rating - DC=20V, Impedance @ Frequency="60 Ohms @ 100 MHz", Designed by=ADAK, Filter type="Signal Line", Manufacturer Product Number=7442335600, Number of Lines=2
L4: library part "IND 3.3UH", "FIXED IND 3.3UH 1.5A 70 MOHM SMD", Current Rating (Amps)=1.5A, DC Resistance (DCR)=70mOhm, Manufacturer="Würth Elektronik", Operating Temperature="-40°C ~ 125°C", Package/Case=Nonstandard, Tolerance=±20%, Inductance="3.3 µH", Designed by=ADAK, Manufacturer Product Number=74404032033, Material - Core=Ferrite
L5: library part "CMC  90OHM", "CMC 370MA 2LN 90OHM SMD AEC-Q200", Current Rating (Max)=370mA, DC Resistance (DCR) (Max)=300mOhm, Manufacturer="Würth Elektronik", Operating Temperature="-40°C ~ 125°C", Package/Case="Horizontal, 4 PC Pad", Voltage Rating - DC=50V, Impedance @ Frequency="90 Ohms @ 100 MHz", Designed by=ADAK, Filter type="Signal Line", Manufacturer Product Number=744232090, Number of Lines=2
R1 R3: library part "RES 330 OHM 0603", "330 Ohms ±1% 0.1W, 1/10W Chip Resistor 0603 (1608 Metric) Moisture Resistant Thick Film", Manufacturer=YAGEO, Operating Temperature="-55°C ~ 155°C", Package/Case="0603 (1608 Metric)", Power(Watts)="0.1W, 1/10W", Resistance=330R, Tolerance=±1%, Designed by=ADAK, Manufacturer Part Number=RC0603FR-07330RL
R2 R5 R6 R10 R12 R13 R14: library part "RES 10K OHM 0603", "10 kOhms ±1% 0.1W, 1/10W Chip Resistor 0603 (1608 Metric) Moisture Resistant Thick Film", Manufacturer=YAGEO, Operating Temperature="-55°C ~ 155°C", Package/Case="0603 (1608 Metric)", Power(Watts)="0.1W, 1/10W", Resistance=10kR, Tolerance=±1%, Designed by=ADAK, Manufacturer Product Number=RC0603FR-0710KL
R4: library part "RES 5K1 OHM 0603", "5.1 kOhms ±1% 0.1W, 1/10W Chip Resistor 0603 (1608 Metric) Moisture Resistant Thick Film", Manufacturer=YAGEO, Operating Temperature="-55°C ~ 155°C", Package/Case="0603 (1608 Metric)", Power(Watts)="0.1W, 1/10W", Resistance=5.1kR, Tolerance=±1%, Designed by=ADAK, Manufacturer Product Number=RC0603FR-075K1L
R7 R8: library part "RES 1K OHM 0603", "1 kOhms ±1% 0.1W, 1/10W Chip Resistor 0603 (1608 Metric) Moisture Resistant Thick Film", Manufacturer=YAGEO, Operating Temperature="-55°C ~ 155°C", Package/Case="0603 (1608 Metric)", Power (Watts)="0.1W, 1/10W", Resistance=1kR, Tolerance=±1%, Designed by=ADAK, Manufacturer Product Number=RC0603FR-071KL
R9: library part "RES 2K OHM 0603", "2 kOhms ±1% 0.1W, 1/10W Chip Resistor 0603 (1608 Metric) Moisture Resistant Thick Film", Manufacturer=YAGEO, Operating Temperature="-55°C ~ 155°C", Package/Case="0603 (1608 Metric)", Power(Watts)="0.1W, 1/10W", Resistance=2kR, Tolerance=±1%, Designed by=ADAK, Manufacturer Product Number=RC0603FR-072KL
R11: library part "RES 12K OHM 0603", "12 kOhms ±1% 0.1W, 1/10W Chip Resistor 0603 (1608 Metric) Moisture Resistant Thick Film", Manufacturer=YAGEO, Operating Temperature="-55°C ~ 155°C", Package/Case="0603 (1608 Metric)", Power(Watts)="0.1W, 1/10W", Resistance=12kR, Tolerance=±1%, Designed by=ADAK, Manufacturer Product Number=RC0603FR-0712KL
R15 R16 R17 R18 R19 R20 R21 R22: library part "RES 0 OHM 0402", "0 Ohms Jumper Chip Resistor 0402 (1005 Metric) Moisture Resistant Thick Film", Manufacturer=YAGEO, Operating Temperature="-55°C ~ 155°C", Package/Case="0402 (1005 Metric)", Resistance=0R, Designed by=ADAK, Manufacturer Product Namer=RC0402FR-070RL
X1: library part "CONN RCP USB3.1 TYPEC", "CONN RCP USB3.1 TYPEC 24P SMD RA", Current Rating (Amps)=5A, Manufacturer="Würth Elektronik", Operating Temperature="-40°C ~ 105°C", Voltage - Rated=20V, Connector Type="USB-C (USB TYPE-C)", Designed by=ADAK, Manufacturer Product Number=632723300011, Mating Cycles=10000, Specifications="USB 3.2 Gen 2 (USB 3.1 Gen 2, Superspeed + (USB 3.1))"
X2: library part "CONN JACK RJ45", "CONN JACK 1PORT 1000 BASE-T PCB", Manufacturer="Würth Elektronik", Operating Temperature="-40°C ~ 85°C", Applications="10/100/1000 Base-T, AutoMDIX", Designed by=ADAK, Manufacturer Product Number=7499111121A, Mounting Type="Through Hole", Series="WE-RJ45 LAN"
Y1: "CRYSTAL 25.0000MHZ 18PF SMD", ESR (Equivalent Series Resistance)="40 Ohms", Frequency=25MHz, Load capacitance=18pF, Manufacturer=EPSON, Operating Temperature="-20°C ~ 85°C", Package/Case="4-SMD, No Lead", Designed by=ADAK, Manufacturer Product Number="TSX-3225 25.0000MF10P-C3", Type="MHz Crystal"

## Via types
v1: diameter 0.305, hole 0.102, Top Layer to Bottom Layer, tented both sides, 391 vias
v2: diameter 0.457, hole 0.152, Top Layer to Bottom Layer, tented both sides, 9 vias

## Nets (pads, with @x,y where several pads share a name; then routed paths per layer and width w, separated by ;. In a path a pad name is that pad's centre, name@x,y a point inside that pad or via, vN(x,y) a via of type N, cw(c..) or ccw(c..) an arc to the next point about the centre after c; other vN are vias at no path point)
+3V3: C3.2 C4.2 C13.2 C14.2 C17.2 C21.2 C28.2 C41.2 C42.2 C43.2 C44.2 C45.2 C46.2 IC1.5 IC2.14 IC2.20 IC2.36 IC2.38 IC2.39 IC2.46 IC3.8 R1.2 R5.2 R6.2 R7.1 R8.1 R10.1 | length 53.6
  Top Layer w0.254: IC2.39@39.3,24.654 39.3,26.086 39.4,26.186 v1(39.4,26.2) ; IC2.38@39.8,24.654 39.8,25.386 40,25.586 v1(40,25.6)
  Top Layer w0.381: v1(34.95,26.819) 35.8,25.969 IC2.46@35.8,24.654
  Bottom Layer w0.381: R8.1@5.97,18.35 5.97,13.33 9.3,10 13.194,10 13.65,10.457 15.55,10.457 16.006,10 20.6,10 27.053,16.453 27.053,20.978 27.05,20.982 27.05,25.25 28.1,26.3 32,26.3 32.95,27.25 34.95,27.25 v1(34.95,26.819)
  other v1: 34.2,6.7 35,6.7 41.5,7.8 33.2,8.9 41.6,8.9 41.6,9.8 42.2,10.5 42.7,11.5 37.4,14.1 43,14.2 44,14.2 37.7,14.5 43.5,15.1 44.6,15.1 35.3,15.3 35.3,16.3 27.053,16.71 45.742,22.521 45.713,23.335 45.7,24.1 42.101,29.166 42.1,29.8
+5V: C1.2 D3.1 FB1.1 IC1.1 R2.2
  other v1: 40.3,2.1 41.7,2.1 44.2,2.3 45.3,2.3 46.4,2.3 47.5,2.3 48.3,3.1 48.3,4.2 41.5,4.3 48.3,5.3 48.3,6.4 47.4,8.2 47.5,11.4 48.5,11.4 49.4,11.4
GND: C1.1 C3.1 C4.1 C6.1 C7.1 C8.1 C10.2 C11.1 C12.1 C13.1 C14.1 C15.1 C16.1 C17.1 C18.2 C19.1 C20.2 C22.1 C23.1 C24.1 C25.1 C26.1 C27.1 C28.1 C29.1 C30.1 C31.1 C32.1 C33.1 C34.1 C35.1 C36.1 C37.1 C38.1 C39.1 C40.1 C41.1 C42.1 C43.1 C44.1 C45.1 C46.1 D1.3 D2.1 D3.2 D4.3 D5.3 D6.3 D7.3 IC1.2 IC2.49 IC3.5 R3.2 R4.1 R9.2 R11.1 R12.1 R13.1 R14.1 R15.1 R16.2 R17.2 R18.2 R19.2 R20.1 R21.1 R22.1 X1.A1 X1.A12 X1.B1 X1.B12 Y1.2 Y1.4 | length 73.4
  Top Layer w0.381: v2(27.5,28.9) 28.481,28.9 29.181,28.2 C19.1@30.35,28.2 ; C29.1@35.05,31 v1(35.05,32.25) ; v1(35.1,10.24) C39.1@35.1,11.5 ; v1(36,6.1) C28.1@36,7.35 ; C35.1@36.55,31 v1(36.55,32.25) ; v1(36.725,10.24) C14.1@36.725,11.5 ; v1(37.7,10.2) 38.156,10.2 38.45,10.494 C13.1@38.45,11.5 ; C36.1@38.05,31 v1(38.05,32.25) ; v1(38.745,3.55) C1.1@38.745,4.8 ; C4.1@39.05,8.755 39.05,9.872 39.427,10.249 v1(39.427,10.27) ; C17.1@39.55,31 v1(39.55,32.25) ; v1(40.1,10.24) C38.1@40.1,11.5 ; C45.1@41.05,31 v1(41.05,32.25) ; v1(42.55,25.1) R11.1@42.55,26.35 ; v1(44.986,9.386) 44.986,8.923 45.209,8.7 D2.1@46,8.7 ; v1(50.95,10.25) C7.1@50.95,11.5 ; v1(52.2,9.35) C8.1@53.45,9.35 ; D5.3@56.8,16.9 v1(56.8,17.336) ; D1.3@56.8,18.95 v1(56.8,20.2) ; D4.3@56.8,22.85 v1(56.8,23.286) ; v1(57.514,19.6) R4.1@57.95,19.6 ; X1.A12@60.92,23.1 v1(60.92,24)
  Top Layer w0.508: C27.1@18.25,6.95 v1(20.1,6.95) ; C24.1@18.252,33.95 v1(20.102,33.95) ; v1(21.205,19) D7.3@22.45,19 ; v1(21.205,24) D6.3@22.45,24 ; v1(24.055,5.855) R13.1@25.3,5.855 ; v1(25.4,10) C12.1@26.65,10 ; v1(25.94,11.96) 25.98,12 C11.1@27.05,12 ; R9.2@31.85,28.2 v1(31.85,29.1) ; IC3.5@32.524,3.545 v1(34.445,3.545) v1@34.45,3.55 ; v1(36,3.7) R14.1@36,4.8 ; v1(37.855,6.755) C3.1@39.04,6.755 ; IC1.2@43.5,4.8 v1(43.5,5.7) ; v1(46.17,7.545) 46.4,7.314 C6.1@46.4,6.3 ; D3.2@49.591,7.85 v1(50.491,7.85) ; v1(59.95,26.85) R3.2@60.85,26.85 ; v1(59.95,28.35) C10.2@60.85,28.35 ; v1(60.2,8) R16.2@61.1,8 ; v1(60.2,9.5) R20.1@61.1,9.5 ; v1(60.2,29.6) R18.2@61.1,29.6 ; v1(60.2,30.6) R19.2@61.1,30.6 ; v1(60.2,31.6) R21.1@61.1,31.6
  Bottom Layer w0.254: C16.1@35.05,28 v1(35.775,27.275)
  Bottom Layer w0.381: C46.1@36,9.1 37.24,9.1 37.367,9.227 v1(37.387,9.227) ; C15.1@44.85,18 44.85,18.75 v1(45.4,19.3)
  Bottom Layer w0.508: R15.1@16.65,4.45 v1(18.75,4.45) ; R22.1@16.65,36.45 v1(18.75,36.45) ; C25.1@17.7,6.2 v1(18.959,6.2) ; C26.1@17.7,8.45 v1(19.8,8.45) ; C22.1@17.7,32.45 v1(19.8,32.45) ; C23.1@17.7,34.7 v1(19.8,34.7) ; v1(27.65,18.45) C32.1@28.8,18.45 ; v1(27.65,20.7) C31.1@28.8,20.7 ; v1(27.65,22.95) C30.1@28.8,22.95 ; v1(43.95,19.35) R12.1@43.95,20.25 ; v1(61.1,10.6) R17.2@61.1,11.5
  other v1: 19.14,3.31 21.68,3.31 24.22,3.31 36.92,3.31 49.62,3.31 52.16,3.31 54.7,3.31 57.24,3.31 59.78,3.31 20.41,5.85 22.95,5.85 38.19,5.85 50.89,5.85 53.43,5.85 55.97,5.85 58.51,5.85 24.22,8.39 26.76,8.39 44.54,8.39 52.16,8.39 59.78,8.39 17.87,10.93 20.41,10.93 22.95,10.93 25.49,10.93 19.14,13.47 29.675,13.659 29.7,14.7 29.74,15.76 20.41,16.01 22.95,16.01 45.81,16.01 48.35,16.01 50.89,16.01 53.43,16.01 58.51,16.01 14.06,18.55 19.14,18.55 21.68,18.55 24.22,18.55 49.62,18.55 52.16,18.55 35.577,19.35 36.6,19.4 37.6,19.4 38.6,19.4 39.6,19.4 35.577,20.35 36.6,20.4 37.6,20.4 38.6,20.4 39.6,20.4 12.79,21.09 15.33,21.09 50.89,21.09 53.43,21.09 35.577,21.35 36.6,21.4 37.6,21.4 38.6,21.4 39.6,21.4 35.577,22.35 36.6,22.4 37.6,22.4 38.6,22.4 39.6,22.4 35.577,23.35 36.6,23.4 37.6,23.4 38.6,23.4 39.6,23.4 19.14,23.63 21.68,23.63 24.22,23.63 49.62,23.63 52.16,23.63 54.7,23.63 59.78,23.63 48.29,25.177 15.33,26.17 20.41,26.17 33.11,26.17 43.27,26.17 45.81,26.17 48.35,26.17 50.89,26.17 53.43,26.17 55.97,26.17 47.8,27.4 44.718,27.444 44.4,28.2 47.976,28.691 16.6,28.71 19.14,28.71 21.68,28.71 24.22,28.71 26.76,28.71 29.3,28.71 49.62,28.71 52.16,28.71 54.7,28.71 57.24,28.71 20.41,31.25 22.95,31.25 28.03,31.25 30.57,31.25 33.11,31.25 50.89,31.25 53.43,31.25 55.97,31.25 58.51,31.25 47.7,33.4 21.68,33.79 24.22,33.79 26.76,33.79 29.3,33.79 31.84,33.79 34.38,33.79 36.92,33.79 39.46,33.79 42,33.79 49.62,33.79 52.16,33.79 54.7,33.79 57.24,33.79 59.78,33.79 47.245,34.063 20.41,36.33 22.95,36.33 25.49,36.33 28.03,36.33 30.57,36.33 33.11,36.33 35.65,36.33 38.19,36.33 40.73,36.33 43.27,36.33 45.81,36.33 48.35,36.33 50.89,36.33 53.43,36.33 55.97,36.33 58.51,36.33 19.14,38.87 21.68,38.87 24.22,38.87 26.76,38.87 29.3,38.87 31.84,38.87 34.38,38.87 36.92,38.87 39.46,38.87 42,38.87 44.54,38.87 47.08,38.87 49.62,38.87 52.16,38.87 54.7,38.87 57.24,38.87 59.78,38.87
LED2: IC2.24 X2.P14 | length 56.2
  Top Layer w0.254: IC2.24@40.3,17.846 40.3,17.85 v1(42.15,17.85)
  Bottom Layer w0.254: X2.P14@4.47,13.725 4.47,9.73 12.795,1.405 18.405,1.405 21,4 21,8.2 29.881,17.081 41.381,17.081 v1(42.15,17.85)
LED3: IC2.33 R7.2 X2.P12 | length 58.1
  Top Layer w0.254: IC2.33@40.954,22.5 44.686,22.5 v1(45.036,22.85)
  Bottom Layer w0.254: X2.P12@4.47,24.435 2.965,24.435 2.4,25 2.4,27.6 5.238,30.438 12.571,30.438 13.109,29.9 18.2,29.9 18.9,30.6 35.1,30.6 35.9,29.8 35.9,28.4 37.9,26.4 37.9,25.3 38.7,24.5 43.386,24.5 v1(45.036,22.85)